# Altium PCB SIM.PcbDoc
Units mil, origin at the board's own origin, x right, y up, seen from the top; angles counter-clockwise.
Board outline 6000 x 4000 mil, 2 copper layers (Top Layer, Bottom Layer); 100 components, 81 nets, 442 pads, 8 vias.
Unrouted connection lines stored in the file: 232.
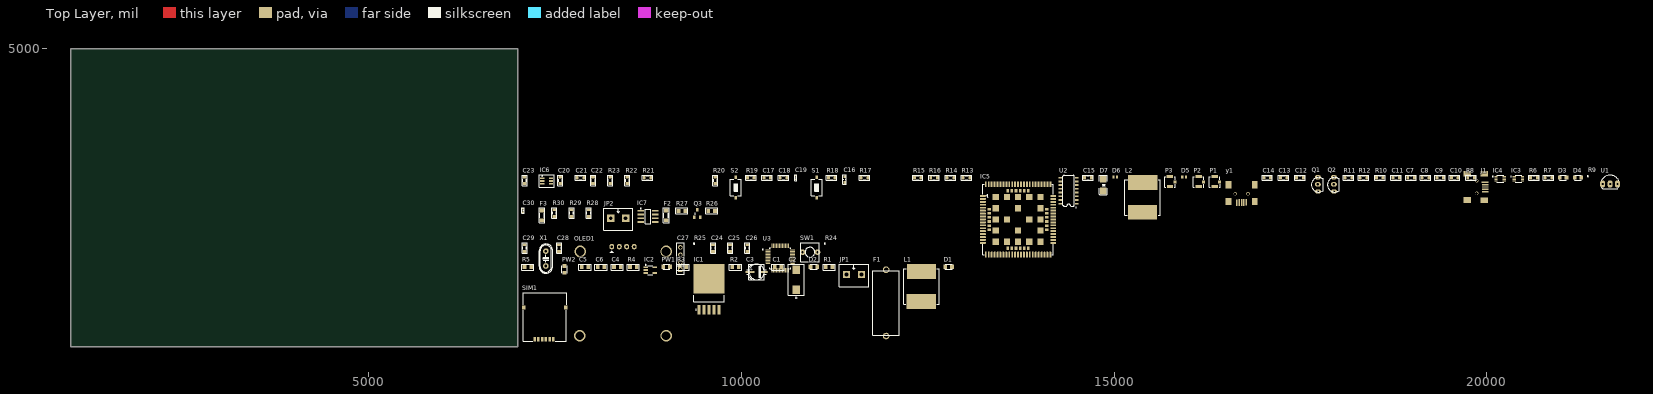
[diagram p0: Top Layer view]
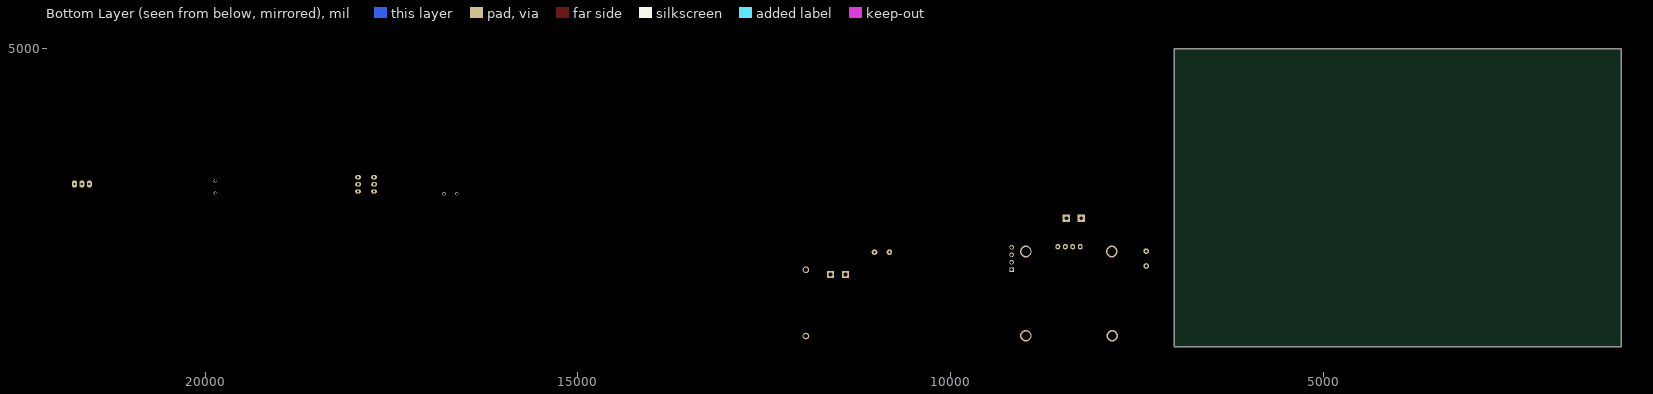
[diagram p1: Bottom Layer view, seen from below]

## Layer stack, top to bottom
Top Solder: solder mask 0.4, Solder Resist, Dk 3.5
Top Layer: signal copper 1.4
Dielectric 1: dielectric 12.6, FR-4, Dk 4.8
Bottom Layer: signal copper 1.4
Bottom Solder: solder mask 0.4, Solder Resist, Dk 3.5

## Board outline
1000,1000 7000,1000 7000,5000 1000,5000

## Design rules (kind name [scope] priority, off if disabled: settings)
Clearance [All] p1: gap=10 ignorepadtopadclearanceinfootprint=FALSE except(0: Arc-Hole Track-Hole SMDPad-Hole THPad-Hole Via-Hole Fill-Hole Poly-Hole Region-Hole Text-Hole)
PolygonConnect [All] p1: connectstyle=Relief reliefconductorwidth=10 reliefentries=4 polygonreliefangle="90 Angle" airgapwidth=10
RoutingVias [All] p1: holewidth=28 width=50 viastyle="Through Hole" minholewidth=28 minwidth=50 maxholewidth=28 maxwidth=50
SolderMaskExpansion [All] p1: expansion=4 istentingtop=FALSE
Width [All] p1: maxlimit=10 minlimit=10 preferedwidth=10
30 further rules are at their usual default settings.

## Classes and differential pairs
component class U_5.RS485: C30 D8 F2 F3 IC7 JP2 L3 Q3 R26 R27 R28 R29 R30
component class U_4.STM32: C24 C25 C26 C27 C28 C29 OLED1 R24 R25 SW1 U3 X1
component class U_2.4G: C7 C8 C9 C10 C11 C12 C13 C14 C15 C16 C17 C18 C19 C20 C21 C22 C23 D3 D4 D5 D6 D7 IC3 IC4 IC5 IC6 J1 L2 P1 P2 P3 Q1 Q2 R6 R7 R8 R9 R10 R11 R12 R13 R14 R15 R16 R17 R18 R19 R20 R21 R22 R23 S1 S2 SIM1 U1 U2 y1
component class U_1.POWER: C1 C2 C3 C4 C5 C6 D1 D2 F1 IC1 IC2 JP1 L1 PW1 PW2 R1 R2 R3 R4 R5

## Components (designator, comment, footprint, x,y, rotation, side; value= is the part's Value field where it differs from the comment)
C1 "4.7uF" C-0805 10490,2070 r0 top value=100nF
C2 "220uF" EEFSDE 10735,1900 r90 top
C3 "470uF/63V" CAP-ALU-SMD-C 10205,2005 r0 top value="Cap 470uF/63V"
C4 "4.7uF" C-0805 8335,2070 r0 top
C5 "10uF" C-0805 7900,2070 r0 top
C6 "10uF" C-0805 8115,2070 r0 top
C7 "100nF" CAP_0805 18985,3270 r0 top value=33p
C8 "10uF" CAP_0805 19180,3270 r0 top value=33p
C9 "100nF" CAP_0805 19375,3270 r0 top value=33p
C10 "100uF" CAP_0805 19570,3270 r0 top value=33p
C11 "104" CAP_0805 18785,3270 r0 top value=33p
C12 "104" CAP_0805 17495,3270 r0 top value=33p
C13 "104" CAP_0805 17275,3270 r0 top value=33p
C14 "104" CAP_0805 17055,3270 r0 top value=33p
C15 "33pF" CAP_0805 14650,3270 r0 top value=33p
C16 "10uF" CAP_0603 11385,3245 r90 top value=33p
C17 "10uF" CAP_0805 10345,3270 r0 top value=33p
C18 "10uF" CAP_0805 10565,3270 r0 top value=33p
C19 "100nF" CAP_0402 10730,3270 r90 top value=33p
C20 "22pF" CAP_0805 7570,3235 r90 top value=33p
C21 "22pF" CAP_0805 7840,3270 r0 top value=33p
C22 "22pF" CAP_0805 8010,3235 r90 top value=33p
C23 "104" CAP_0805 7090,3235 r90 top value=33p
C24 "100nF" CAP_0805 9620,2325 r90 top value=33p
C25 "104" CAP_0805 9850,2325 r90 top value=33p
C26 "104" CAP_0805 10080,2325 r90 top value=33p
C27 "JP4" JP4-C1T 9180,2035 r90 top
C28 "22pF" CAP_0805 7555,2325 r90 top value=33p
C29 "22pF" CAP_0805 7090,2325 r90 top value=33p
C30 "100nF" CAP_0402 7070,2830 r90 top value=33p
D1 "M7" LED-0805-Blue 12735,2075 r0 top value=1N4007
D2 "SS36" LED-0805-Blue 10925,2075 r0 top value="40V 3A"
D3 "NET" LED-0805-Blue 20980,3270 r0 top value="LED 3 ly Single Colour"
D4 "PPS" LED-0805-Blue 21180,3270 r0 top value="LED 3 ly Single Colour"
D5 "LXES15AAA1-153" INDC1005X45 15940,3280 r0 top value=4V
D6 "LXES15AAA1-153" INDC1005X45 15015,3280 r0 top value=4V
D7 "dio214AC SMA" DIO-SMD-106 14855,3170 r90 top value=1N4007
F1 "F1A" Fuse3 11940,1590 r90 top value=Fuse
F2 "F1A" RES-SMD-1206 8990,2765 r90 top value=Fuse
F3 "F1A" RES-SMD-1206 7325,2765 r90 top value=Fuse
IC1 "LM2576" TO-263 9565,1735 r90 top
IC2 "AP7335A-33W5-7" SOT23-5 8775,2030 r0 top
IC3 "TXB0102DCUR" SOP50P310X90-8N 20425,3255 r0 top
IC4 "TXB0102DCUR" SOP50P310X90-8N 20180,3255 r0 top
IC5 "SIM A7672S" A7672S 13711.38,2709.65 r0 top
IC6 "TPD4E001" SOT23-6 7385,3225 r0 top
IC7 "MAX3485" SOIC-8 8745,2750 r0 top
J1 "USB-5" USB-B-Mini 19965,3145 r90 top
JP1 "JP2" KF2-5.08 11510,1970 r0 top value="Connector 2"
JP2 "JP2" KF2-5.08 8345,2725 r0 top value="Connector 2"
L1 "33uH" Inductor_SMD 12175,1570 r0 top value=220uH
L2 "47nH" Inductor_SMD 15145,2765 r0 top value="150 mH"
OLED1 "SSD1306" "OLED 1.3" 8415,1755 r0 top
P1 "IPX" IPXS 16400,3215 r0 top
P2 "IPX" IPXS 16185,3215 r0 top
P3 "IPX" IPXS 15800,3215 r0 top
PW1 "LED 0805" LED-0805-Blue 8950,2075 r0 top value=Red
PW2 "LED 0805" LED-0805-Blue 7625,1995 r90 top value=Red
Q1 "3904" TRAN-LOWPOWER 17740,3175 r0 top
Q2 "3904" TRAN-LOWPOWER 17955,3175 r0 top
Q3 "C1815(MMBT4401)" SOT23 9405,2790 r0 top
R1 "10k" R-0805 11175,2070 r0 top
R2 "1k" R-0805 9920,2070 r0 top
R3 "4.7k" R-0805 9215,2070 r0 top value=3.3k
R4 "1k" R-0805 8550,2070 r0 top
R5 "0R" R-0805 7135,2070 r0 top value=1k
R6 "1k" RES-SMD-0805 20635,3270 r0 top
R7 "1k" RES-SMD-0805 20830,3270 r0 top
R8 "1k" RES-SMD-0805 19790,3270 r0 top
R9 "4,7K" RES-SMD-0101 21360,3295 r90 top
R10 "1k" RES-SMD-0805 18565,3270 r0 top
R11 "330R" RES-SMD-0805 18145,3270 r0 top
R12 "330R" RES-SMD-0805 18345,3270 r0 top
R13 "10R" RES-SMD-0805 13020,3270 r0 top
R14 "10k" RES-SMD-0805 12805,3270 r0 top
R15 "1K" RES-SMD-0805 12365,3270 r0 top
R16 "10k" RES-SMD-0805 12585,3270 r0 top
R17 "1K" RES-SMD-0805 11650,3270 r0 top
R18 "0R" RES-SMD-0805 11210,3270 r0 top
R19 "0R" RES-SMD-0805 10125,3270 r0 top
R20 "10K" RES-SMD-0805 9650,3235 r90 top
R21 "22R" RES-SMD-0805 8740,3270 r0 top
R22 "22R" RES-SMD-0805 8470,3235 r90 top
R23 "22R" RES-SMD-0805 8240,3235 r90 top
R24 "10K" RES-SMD-0101 11120,2385 r90 top
R25 "10K" RES-SMD-0101 9365,2385 r90 top
R26 "4.7k" R-0805 9600,2825 r0 top
R27 "1k" R-0805 9200,2825 r0 top
R28 "4K7" RES-SMD-0805 7950,2795 r90 top
R29 "120R" RES-SMD-0805 7720,2795 r90 top
R30 "4K7" RES-SMD-0805 7490,2795 r90 top
S1 "RST" SW-SMD 11010,3140 r90 top
S2 "BTN" SW-SMD 9925,3140 r90 top
SIM1 "Sim holder" "SIM_MicroSIM 6P Flip" 7360,1315 r0 top
SW1 "SW" SW2 10820,2270 r0 top value="SW chip 2 pin"
U1 "DS18B20" QTO-92A 21655,3185 r0 top
U2 "CH340C" SOP-16 14390,3095 r90 top
U3 "STM32F103C8T6" STM32F103C8T6 9760,2125 r0 top
X1 "4Mhz" XT2 7375,2185 r90 top
y1 "USB-5" USB-B-Mini 16710,2950 r0 top

## Footprints (in the part's own frame and the unit in brackets; to place one, negate y for a bottom-side part, rotate by r counter-clockwise, add the part's x,y. Pads: shape width x height; smd on the part's side, far side on the other; paste and mask are expansions set on the pad)
A7672S [mm] "SIMCOM A7672S"
  rrect50% 2x0.635 smd: 1(-12,8) 2(-12,7) 3(-12,6) 4(-12,5) 5(-12,4) 6(-12,3) 7(-12,2) 8(-12,1) 9(-12,0) 10(-12,-1) 11(-12,-2) 12(-12,-3) 13(-12,-4) 14(-12,-5) 15(-12,-6) 16(-12,-7) 17(-12,-8) 35(12,-8) 36(12,-7) 37(12,-6) 38(12,-5) 39(12,-4) 40(12,-3) 41(12,-2) 42(12,-1) 43(12,0) 44(12,1) 45(12,2) 46(12,3) 47(12,4) 48(12,5) 49(12,6) 50(12,7) 51(12,8)
  rrect50% 0.635x2 smd: 18(-8,-12) 19(-7,-12) 20(-6,-12) 21(-5,-12) 22(-4,-12) 23(-3,-12) 24(-2,-12) 25(-1,-12) 26(0,-12) 27(1,-12) 28(2,-12) 29(3,-12) 30(4,-12) 31(5,-12) 32(6,-12) 33(7,-12) 34(8,-12) 52(8,12) 53(7,12) 54(6,12) 55(5,12) 56(4,12) 57(3,12) 58(2,12) 59(1,12) 60(0,12) 61(-1,12) 62(-2,12) 63(-3,12) 64(-4,12) 65(-5,12) 66(-6,12) 67(-7,12) 68(-8,12) 89(-11,-12) 90(-10,-12) 91(-9,-12) 92(9,-12) 93(10,-12) 94(11,-12) 95(11,12) 96(10,12) 97(9,12) 98(-9,12) 99(-10,12) 100(-11,12)
  rect 2.1x2.1 smd: 69(-7.6,7.6) 70(-7.6,3.8) 71(-7.6,0) 72(-7.6,-3.8) 73(-7.6,-7.6) 74(-3.8,-7.6) 75(0,-7.6) 76(3.8,-7.6) 77(7.6,-7.6) 78(7.6,-3.8) 79(7.6,0) 80(7.6,3.8) 81(7.6,7.6) 82(3.8,7.6) 83(0,7.6) 84(-3.8,7.6) 85(-3.8,0) 86(0,-3.8) 87(3.8,0) 88(0,3.8)
  rect 1.1x0.9 smd: 101(-9.8,3.5) 102(-9.8,2.1) 103(-9.8,0.7) 104(-9.8,-0.7) 105(-9.8,-2.1) 106(-9.8,-3.5) 113(9.8,-3.5) 114(9.8,-2.1) 115(9.8,-0.7) 116(9.8,0.7) 117(9.8,2.1) 118(9.8,3.5)
  rect 0.9x1.1 smd: 107(-3.5,-9.8) 108(-2.1,-9.8) 109(-0.7,-9.8) 110(0.7,-9.8) 111(2.1,-9.8) 112(3.5,-9.8) 119(3.5,9.8) 120(2.1,9.8) 121(0.7,9.8) 122(-0.7,9.8) 123(-2.1,9.8) 124(-3.5,9.8)
  silkscreen extent -12,-12 12,12, body extent -12,-12 12,12, height 2.6
C-0805 [mil] "Compoment SMD 80x50mil"
  rect 50x55 smd: 1(-45,0) 2(45,0)
  silkscreen extent -81,-39 81,39, body extent -40,-25 40,25, height 24
CAP-ALU-SMD-C [mm]
  rect 3x0.7 smd: 1(-2.286,0)
  oval 3x0.7 smd: 2(2.286,0)
  silkscreen extent -3.35,-2.65 3.28,2.65, body extent -2.95,-2.65 2.95,2.65, height 5.41
CAP_0402 [mm]
  rect 0.5x0.6 smd: 1(-0.61,0) 2(0.61,0)
  silkscreen extent -0.97,-0.38 0.97,0.41, body extent -0.5,-0.27 0.5,0.26, height 0.35
CAP_0603 [mm]
  rect 1x0.95 smd mask+0.076: 1(-0.94,0) 2(0.94,0)
  silkscreen extent -1.57,-0.58 1.57,0.58, body extent -0.77,-0.39 0.83,0.41, height 0.9
CAP_0805 [mil]
  rect 39.37x55 smd: 1(-45,0) 2(45,0)
  silkscreen extent -70,-34 70,33, body extent -40,-25 40,25, height 24
DIO-SMD-106 [mil]
  rect 90x90.55 smd: 1(80,0) 2(-80,0)
  silkscreen extent -130,-55 135,55, body extent -99,-50 106,52, height 95
EEFSDE [mm]
  rect 3x2.4 smd: 1(-3.429,0) 2(3.429,0)
  silkscreen extent -6.48,-2.66 5.33,2.66, body extent -3.81,-2.15 3.81,2.15, height 4.21
Fuse3 [mm] "FUSEHOLDER BLOCKS - PCB - CLIP COVER - THT - WR-FSH"
  round 2.25 hole 1.5: 1(-11.3,0) 2(11.3,0)
  silkscreen extent -11,-4.5 11,4.5, body extent -13.3,-4.5 13.3,4.5, height 28.11
INDC1005X45 [mm]
  rect 0.7x0.9 smd: 1(-0.65,0) 2(0.65,0)
Inductor_SMD [mm]
  rect 10x5 smd: 1(6.096,11.176) 2(6,1)
  silkscreen extent 0,0 12.1,12.1, body extent 0.1,-0.2 12.1,12.14, height 7.15
IPXS [mm] "SOT 23 _ 1-3-2"
  rect 1x1 smd: 1(0.415,-0.01)
  rect 2.2x1 smd: 2(-1.273,-1.658) 3(-1.278,1.73)
  silkscreen extent -3.13,-1.79 0.53,1.73, body extent -2.83,-1.49 0.31,1.56, height 1.55
JP4-C1T [mm] "4 row, straight, gold plating"
  rect 1.52x1.52 hole 1.02: 1(0,0)
  round 1.52 hole 1.02: 2(2.54,0) 3(5.08,0) 4(7.62,0)
  silkscreen extent -1.52,-1.27 9.14,1.27, body extent -1.52,-1.25 9.14,1.25, height 8.51
KF2-5.08 [mm]
  rect 2.5x2.5 hole 1.3: 1(-2.54,0) 2(2.54,0)
  silkscreen extent -4.95,-4.08 4.95,3.43, body extent -5,-4.07 5,3.43, height 10
LED-0805-Blue [mil]
  rect 50x55 smd: 1(0,0) 2(90,0)
  silkscreen extent 0,-35 90,35, body extent 5,-25 85,25, height 43
"OLED 1.3" [mil]
  oval 65x75 hole 36: 1(-155,590) 2(-54,590) 3(44,590) 4(145,590)
  silkscreen extent -180,509 -130,534, body extent -661,-687 657,640, height 553
QTO-92A [mil] "TO-92"
  oval 66x100 hole 32: 1(100,0) 2(0,0) 3(-100,0)
  silkscreen extent -117,-65 119,118, body extent -110,-61 108,100, height 245
R-0805 [mil] "Compoment SMD 80x50mil"
  rect 50x55 smd: 1(-45,0) 2(45,0)
  silkscreen extent -81,-39 81,39, body extent -39,-25 39,25, height 31
RES-SMD-0101 [mm]
  rect 0.15x0.25 smd: 1(-0.2,0) 2(0.2,0)
  silkscreen extent -0.25,-0.13 0.25,0.13, body extent -0.2,-0.1 0.2,0.1, height 0.12
RES-SMD-0805 [mil]
  rect 39.37x55 smd: 1(-45,0) 2(45,0)
  silkscreen extent -70,-34 70,33, body extent -39,-25 39,25, height 31
RES-SMD-1206 [mil]
  rect 50x65 smd: 1(-65,0) 2(65,0)
  silkscreen extent -99,-38 99,39, body extent -63,-31 63,32, height 40
"SIM_MicroSIM 6P Flip" [mm]
  rect 0.85x1.4 smd: 1(-2.16,-5.415) 2(0.38,-5.415) 3(2.92,-5.415) 5(-3.43,-5.415) 6(-0.89,-5.415) 7(1.65,-5.415)
  rect 1.2x1.5 smd: 8(-7.15,5.415) 8(7.15,5.415)
  Top Layer pour cut-out: 3.683,-2.79 -4.293,-2.79 -4.293,1.96 3.683,1.96
  Top Layer pour cut-out: 3.683,8.788 -4.293,8.788 -4.293,4.039 3.683,4.039
  silkscreen extent -7.35,-6.02 7.35,10.52, body extent -7.61,-5.89 7.59,10.41, height 1.7
SOIC-8 [mm] "SOIC, 8-Leads, Body 5,0x4,0mm (max), Pitch 1,27mm, IPC Medium Density"
  rect 2.2x0.6 smd: 1(-2.475,1.905) 2(-2.475,0.635) 3(-2.475,-0.635) 4(-2.475,-1.905) 5(2.475,-1.905) 6(2.475,-0.635) 7(2.475,0.635) 8(2.475,1.905)
  silkscreen extent -2.6,-2.5 0.98,2.88, body extent -3.2,-2.5 3.2,2.5, height 1.75
SOP50P310X90-8N [mm]
  rrect25% 1.12x0.27 smd: 1(-1.405,0.75) 2(-1.405,0.25) 3(-1.405,-0.25) 4(-1.405,-0.75) 5(1.405,-0.75) 6(1.405,-0.25) 7(1.405,0.25) 8(1.405,0.75)
  silkscreen extent -2.62,-1.2 1.15,1.2
SOP-16 [mm]
  rect 0.6x1.2 smd: 1(-4.445,-2.8) 2(-3.175,-2.8) 3(-1.905,-2.8) 4(-0.635,-2.8) 5(0.635,-2.8) 6(1.905,-2.8) 7(3.175,-2.8) 8(4.445,-2.8) 9(4.445,2.8) 10(3.175,2.8) 11(1.905,2.8) 12(0.635,2.8) 13(-0.635,2.8) 14(-1.905,2.8) 15(-3.175,2.8) 16(-4.445,2.8)
  silkscreen extent -5.84,-2.67 5.26,1.95, body extent -4.95,-3.47 4.95,3.47, height 1.75
SOT23 [mm] "SOT 23 _ 1-3-2"
  rect 0.85x1.2 smd: 1(-0.94,-1.245) 2(0.985,-1.25) 3(0.005,1.25)
  silkscreen extent -0.88,-0.25 -0.64,0, body extent -1.47,-1.33 1.53,1.17, height 1.06
SOT23-5 [mm] "SOT23, 5-Leads, Body 3.0x3.0mm (max), Pitch 0.95mm, IPC Medium Density"
  rect 1.5x0.6 smd: 1(-1.5,0.95) 2(-1.5,0) 3(-1.5,-0.95) 4(1.5,-0.95) 5(1.5,0.95)
  silkscreen extent -1.62,-1.52 0.87,1.92, body extent -1.75,-1.52 1.75,1.53, height 1.45
SOT23-6 [mm] "SOT23, 5-Leads, Body 3.0x3.0mm (max), Pitch 0.95mm, IPC Medium Density"
  rect 1.5x0.6 smd: 1(-1.5,0.95) 2(-1.5,0) 3(-1.5,-0.95) 4(1.5,-0.95) 5(1.5,0) 6(1.5,0.95)
  silkscreen extent -2.54,-2.11 2.54,2.11, body extent -1.75,-1.52 1.75,1.53, height 1.45
STM32F103C8T6 [mm]
  rrect50% 1.56x0.28 smd: 1(15.124,4.401) 2(15.124,3.901) 3(15.124,3.401) 4(15.124,2.901) 5(15.124,2.401) 6(15.124,1.901) 7(15.124,1.401) 8(15.124,0.901) 9(15.124,0.401) 10(15.124,-0.099) 11(15.124,-0.599) 12(15.124,-1.099) 25(23.484,-1.099) 26(23.484,-0.599) 27(23.484,-0.099) 28(23.484,0.401) 29(23.484,0.901) 30(23.484,1.401) 31(23.484,1.901) 32(23.484,2.401) 33(23.484,2.901) 34(23.484,3.401) 35(23.484,3.901) 36(23.484,4.401)
  rrect50% 0.28x1.56 smd: 13(16.554,-2.529) 14(17.054,-2.529) 15(17.554,-2.529) 16(18.054,-2.529) 17(18.554,-2.529) 18(19.054,-2.529) 19(19.554,-2.529) 20(20.054,-2.529) 21(20.554,-2.529) 22(21.054,-2.529) 23(21.554,-2.529) 24(22.054,-2.529) 37(22.054,5.831) 38(21.554,5.831) 39(21.054,5.831) 40(20.554,5.831) 41(20.054,5.831) 42(19.554,5.831) 43(19.054,5.831) 44(18.554,5.831) 45(18.054,5.831) 46(17.554,5.831) 47(17.054,5.831) 48(16.554,5.831)
  silkscreen extent 13.15,-1.95 22.9,5.25
SW2 [mil] "SW button 2pin, 250x 250 mil"
  round 75 hole 31: 1(0,0) 2(200,0)
  silkscreen extent -25,-125 225,125
SW-SMD [mm] "Switch SMD type"
  rect 1.2x0.8 smd: 1(-3.5,0) 2(3.5,0)
  silkscreen extent -2.82,-1.85 2.82,1.85, body extent -3.05,-1.85 3.05,1.85, height 2.5
TO-263 [mm]
  rect 3.2x1.05 smd: 1(-6,3.4) 2(-6,1.7) 3(-6,0) 4(-6,-1.7) 5(-6,-3.4)
  rect 10x10.45 smd: 6(4.5,0)
  silkscreen extent -6.12,-5.2 -1.1,5.2, body extent -6.58,-5.2 7.57,5.2, height 4.65
TRAN-LOWPOWER [mm] "TO, Flat Index; 3 In-Line, Axial Leads; Body Dia. 4.5mm; Leads 0.51 x 0.48 mm (max)"
  oval 2x1.5 hole 0.8: 1(-0.127,-2.286) 2(-0.151,0.139) 3(-0.127,2.564)
  silkscreen extent -2.35,-2.48 1.63,2.48, body extent -2.48,-2.79 1.52,3.01, height 11
USB-B-Mini [mm]
  rect 2x2.5 smd: 0(-4.5,0) 0(-4.496,5.74) 0(4.5,0) 0(4.504,5.74)
  rect 0.5x2.25 smd: 1(1.575,-0.305) 2(0.787,-0.317) 3(0,-0.33) 4(-0.787,-0.343) 5(-1.575,-0.356)
  body extent -5.35,-0.67 5.35,8.53, height 3.95
XT2 [mil] "Footpin for Crystal 2 pin"
  round 75 hole 34: 1(-100,0) 2(100,0)
  silkscreen extent -198,-90 195,90, body extent -233,-93 213,90, height 138

## Part data
C1 C4: library part C, "4.7µF ±10% 35V Ceramic Capacitor X5R 0805 (2012 Metric)", Manufacturer="Samsung Electro-Mechanics", Package=0805, Part number=CL21A475KLCLQNC, Category=CAPACITOR, User_Description="CAP CER 4.7UF 35V X5R 0805"
C2: library part CP5, "220µF Molded Tantalum Polymer Capacitor 16V 2917 (7343 Metric) 40mOhm @ 100kHz", Manufacturer="AVX Corporation", Package=2917, Part number=TCME227M016R0040E, Category=CAPACITOR, User_Description="CAP TANT POLY 220UF 16V 2917"
C3: library part CP3, "Cap 470uF/63V"
C5 C6: library part C, "Cap SMD", Manufacturer="Samsung Electro-Mechanics", Package=0805, Part number=CL21A106KPFNNNG, Category=CAPACITOR, User_Description="CAP CER 10UF 10V X5R 0805"
C7 C8 C9 C10 C11 C12 C13 C14 C15 C16 C17 C18 C19 C20 C21 C22 C23 C24 C25 C26 C28 C29 C30: library part CapSMD, "Capacitor", LatestRevisionDate=17-Jul-2002, LatestRevisionNote="Re-released for DXP Platform.", PackageReference=RAD-0.3, Published=8-Jun-2000, Publisher="Altium Limited"
C27: "WR-PHD 2.54 mm Angled Socket Header", Manufacturer="W¨¹rth Elektronik eiSos GmbH", partNo=613004143121, ComponentLink1 Description=Manufacturer, ComponentLink1URL=http://www.we-online.com, ComponentLink2 Description=Datasheet, ComponentLink2URL=http://katalog.we-online.de/em/datasheet/6130xx143121.pdf, Created by="Karrer Zheng", Created Date="29 March 2013", NoPins=04
D1 D7: library part D1A, "Diode 1A"
D2: library part B340A, "Diode Schottky 40V 3A Surface Mount DO-214AC (SMA)", Manufacturer="Vishay General Semiconductor - Diodes Division", Package=DO214AC, Part number=B340A-M3/61T, Category=DIODE, User_Description="DIODE SCHOTTKY 40V 3A DO214AC"
D3 D4: library part LED, "LED Single colour Green and Red"
D5 D6: library part TVS, "TVS DIODE 4VWM 1005", Manufacturer="Murata Electronics", Package=0402, Category="Circuit Protection", Part number=LXES15AAA1-153, User_Description="TVS DIODE 4VWM 1005"
F1: library part Fuse, "Fuse"
F2 F3: library part Fuse, "F smd1206 0.315A", Designed by=VanDungEvn
IC2: Package=SOT23-5, Part number=AP7335A-33W5-7
IC3 IC4: "IC TRNSLTR BIDIRECTIONAL US8", Manufacturer="Texas Instruments", Package=8-VSSOP, Category="IC Logic Level", Part number=TXB0102DCUR, User_Description="IC TRNSLTR BIDIRECTIONAL US8"
IC5: "SIM A7672S-CAT-M1", Part number="SIM A7672S"
IC6: library part TPD4E001_1, Manufacturer="Texas Instruments", Package=SOT-363, Part number=TPD4E001RDBVR, Category="Circuit Protection", User_Description="TVS DIODE 5.5VWM SC70-6"
IC7: library part MAX3362EKA+T, "IC TRANSCEIVER HALF 1/1 SOT23-8", Manufacturer="Maxim Integrated", Package=SOT-23-8, Category="Interface - Drivers", Part number=MAX3362EKA+T, User_Description="IC TRANSCEIVER HALF 1/1 SOT23-8"
J1 y1: Manufacturer=FCI, Category="Connectors, Interconnects"
JP1 JP2: library part Con2, "Connector 2"
L1: library part L1, "22µH Shielded Inductor 1.65A 96mOhm Max Nonstandard", Manufacturer="Bourns Inc.", Package=SMD, Part number=SRR0745A-220M, Category=INDUCTORS, User_Description="FIXED IND 22UH 1.65A 96 MOHM SMD"
L2: library part "Inductor Ferit", "FIXED IND 47NH 300MA 700MOHM SMD", Manufacturer="Taiyo Yuden", Package=0603, Part number=HK160847NJ-T, Category=INDUCTORS, User_Description="FIXED IND 47NH 300MA 700MOHM SMD"
OLED1: library part "OLED 1.3\"", "OLED 1.3\" SSD1306"
P1 P2 P3: library part IPXSx66, "Antenna GSM GPS", Manufacturer="TE Connectivity AMP Connectors", Package=SMD, Part number=2334884-1, Category=Connectors, User_Description="UMCC MICRO-COAX RECEPTACLE, GEN"
PW1 PW2: library part LED, "LED RED DIFFUSED 0805 SMD", Manufacturer="OSRAM Opto Semiconductors Inc.", Package=0805, Part number="LS R976-NR-1", Category="LED SMD", User_Description="LED RED DIFFUSED 0805 SMD"
Q1 Q2: library part MMBT3904
Q3: library part NPN, "Transistor C1815, SOT23", Manufacturer="Fairchild Semiconductor", Package=SOT-23, Part number=MMBT4401, Category="TRAN NPN", User_Description="0.6A, 40V, NPN"
R1: library part R, "RES SMD 10K OHM 1% 1/8W 0805", Manufacturer=Yageo, Package=0805, Part number=RC0805FR-0710KL, Category=RESISTORS, User_Description="RES SMD 10K OHM 1% 1/8W 0805"
R2 R4 R5 R27: library part R, "Resistor 1/4W", Manufacturer=Yageo, Package=0805, Part number=RC0805FR-071KL, Category=RESISTORS, User_Description="RES SMD 1K OHM 1% 1/8W 0805"
R3: library part R, "RES SMD 3.3K OHM 1% 1/8W 0805", Manufacturer=Yageo, Package=0805, Part number=RC0805FR-073K3L, Category=RESISTORS, User_Description="RES SMD 3.3K OHM 1% 1/8W 0805"
R6 R7 R8 R10 R11 R12 R13 R14 R15 R16 R17 R18 R19 R20 R21 R22 R23 R24 R25: library part "Resistor - SMD", "Resistor", Manufacturer="Generic Components", Class=Passive, Published=08/06/2000, Publisher="Altium Hobart Technology Centre"
R9 R28 R29 R30: library part "Resistor - SMD", "Resistor SMD", Manufacturer="Generic Components", Class=Passive, Published=08/06/2000, Publisher="Altium Hobart Technology Centre"
R26: library part R, "RES SMD 4.7K OHM 1% 1/8W 0805", Manufacturer=Yageo, Package=0805, Part number=RC0805FR-074K7L, Category=RESISTORS, User_Description="RES SMD 4.7K OHM 1% 1/8W 0805"
S1 S2: library part SW-SMD, "Switch", LatestRevisionDate=17-Jul-2002, LatestRevisionNote="Re-released for DXP Platform.", PackageReference=SPST-2, Published=24-Mar-1999, Publisher="Altium Limited"
SIM1: library part SIM_MicroSim
SW1: library part SW2, "Switch button 2 pin"
U1: "High Precision  1-Wire® Digital Thermometer"
U2: "USB to serial chip CH340", Package=Package, Availability=Unavailable, Check_prices=https://www.snapeda.com/parts/CH340C/WCH/view-part/5428851/?ref=eda, MF=WCH, MP=CH340C, Price=None, SnapEDA_Link=https://www.snapeda.com/parts/CH340C/WCH/view-part/5428851/?ref=snap
U3: "Mainstream Performance line, ARM Cortex-M3 MCU with 64 Kbytes Flash, 72 MHz CPU, motor control, USB and CAN"
X1: library part XT2, "Crystal For all Crystal 2pin."

## Via types
v1: diameter 157.48, hole 118.11, Top Layer to Bottom Layer, 4 vias
v2: diameter 47.24, hole 39.37, Top Layer to Bottom Layer, 4 vias

## Nets (pads, with @x,y where several pads share a name; then routed paths per layer and width w, separated by ;. In a path a pad name is that pad's centre, name@x,y a point inside that pad or via, vN(x,y) a via of type N, cw(c..) or ccw(c..) an arc to the next point about the centre after c; other vN are vias at no path point)
1.8V: C12.2 C14.2 C17.2 IC3.3 IC4.3 IC5.15 R8.1 R10.1 R18.2
3.3LOG_RX: IC3.1 U2.2
3.3LOG_TX: IC3.8 U2.3
3.3V: C6.1 C11.2 C13.2 IC2.5 IC3.7 IC4.7 R4.2 R26.1
3.8V: C2.1 C4.2 C5.1 C7.2 C8.2 C9.2 C10.2 IC2.1 IC2.3 IC5.55 IC5.56 IC5.57 L1.2 R1.2 R2.1 R6.2 R7.2 R9.2 U1.3
3V3: C19.1 C25.1 C26.1 C27.1 C30.1 IC7.8 OLED1.2 R24.1 R28.2 U2.4 U3.24 U3.36 U3.48
5V: C18.1 D7.2 U2.16
485DE/RE: R27.1
A: IC7.6 R30.1
B: IC7.7 R28.1
CLK: IC6.1 R23.2 SIM1.3
DATA: IC5.5 IC6.3 R9.1 R21.2 SIM1.7 U1.2
DE/RE: IC7.2 IC7.3 Q3.3 R26.2
DIO: C27.2 U3.34
DM: IC5.28 J1.2
DP: IC5.27 J1.3
GND: C4.1 C5.2 C6.2 C7.1 C8.1 C9.1 C10.1 C11.1 C12.1 C13.1 C14.1 C16.1 C17.1 C18.2 C19.2 C20.1 C21.1 C22.1 C23.1 C24.2 C25.2 C26.2 C27.4 C28.1 C29.1 C30.2 D5.2 D6.2 IC2.2 IC3.2 IC4.2 IC5.2 IC5.17 IC5.18 IC5.29 IC5.39 IC5.45 IC5.46 IC5.54 IC5.58 IC5.59 IC5.61 IC5.62 IC5.63 IC5.64 IC5.65 IC5.89 IC5.91 IC5.92 IC5.94 IC6.2 IC7.5 J1.5 OLED1.1 P1.2 P1.3 P2.2 P2.3 P3.2 P3.3 PW1.2 PW2.2 Q1.2 Q2.2 Q3.2 R5.1 R15.1 R20.1 R25.1 R30.2 S1.1 SIM1.5 SIM1.8 SW1.2 U1.1 U2.1 U3.23 U3.35 U3.47 y1.5
GND_IN: C1.1 C2.2 C3.2 D2.1 IC1.3 IC1.5 IC1.6 JP1.1 R3.1 R5.2
LOG_RX: IC3.4 IC5.22
LOG_TX: IC3.5 IC5.23
NET: IC5.52
NetC15_1: C15.1 IC5.90
NetC15_2: C15.2 L2.1 P2.1
NetC20_2: C20.2 IC5.32 R23.1
NetC21_2: C21.2 IC5.33 R22.1
NetC22_2: C22.2 IC5.31 R21.1
NetC28_2: C28.2 U3.5 X1.2
NetC29_2: C29.2 U3.6 X1.1
NetD1_1: D1.1 F1.2
NetD2_2: D2.2 IC1.2 L1.1
NetD3_1: D3.1 R6.1
NetD3_2: D3.2 Q1.3
NetD4_1: D4.1 R7.1
NetD4_2: D4.2 Q2.3
NetD5_1: D5.1 IC5.93 P1.1
NetD6_1: D6.1 IC5.60 P3.1
NetD7_1: D7.1 y1.1
NetF1_1: F1.1 JP1.2
NetF2_1: F2.1
NetF2_2: F2.2 JP2.1 R29.1
NetF3_1: F3.1
NetF3_2: F3.2 JP2.2 R29.2
NetIC1_4: IC1.4 R1.1 R3.2
NetIC3_6: IC3.6 R8.2
NetIC4_1: IC4.1 U3.30
NetIC4_6: IC4.6 R10.2
NetIC4_8: IC4.8 U3.31
NetIC5_1: IC5.1 R15.2
NetIC5_6: IC5.6 S2.2
NetIC5_16: IC5.16 R17.2
NetIC5_20: IC5.20 R19.1
NetIC5_49: IC5.49 R16.2
NetIC5_50: IC5.50 R14.2
NetIC5_95: IC5.95 R16.1
NetIC5_96: IC5.96 R14.1
NetIC5_97: IC5.97 IC5.116 R18.1
NetIC5_98: IC5.98 R19.2
NetIC5_99: IC5.99 R13.1
NetIC7_1: IC7.1 U3.39
NetIC7_4: IC7.4 U3.20
NetL2_2: L2.2 R13.2
NetPW1_1: PW1.1 R2.2
NetPW2_1: PW2.1 R4.1
NetQ1_1: Q1.1 R11.1
NetQ2_1: Q2.1 R12.1
NetQ3_1: Q3.1 R27.2
NetR17_1: R17.1 S1.2
NetR20_2: R20.2 S2.1
NetR25_2: R25.2 U3.44
NetU2_5: U2.5 y1.3
NetU2_6: U2.6 y1.2
OLED_SCL: OLED1.3 U3.42
OLED_SDA: OLED1.4 U3.43
RESET: IC6.6 R22.2 SIM1.2
SIM_PPS: IC5.100 R12.2
SIM_RX: IC4.4 IC5.10
SIM_TX: IC4.5 IC5.9
STATUS: IC5.66 R11.2
V_USIM: C23.2 IC5.30 IC6.5 SIM1.1
VBUS: C16.2 IC5.24 J1.1
VIN: C1.2 C3.1 D1.2 IC1.1
pads on no net: C24.1 C27.3 IC2.4 IC5.3 IC5.4 IC5.7 IC5.8 IC5.11 IC5.12 IC5.13 IC5.14 IC5.19 IC5.21 IC5.25 IC5.26 IC5.34 IC5.35 IC5.36 IC5.37 IC5.38 IC5.40 IC5.41 IC5.42 IC5.43 IC5.44 IC5.47 IC5.48 IC5.51 IC5.53 IC5.67 IC5.68 IC5.69 IC5.70 IC5.71 IC5.72 IC5.73 IC5.74 IC5.75 IC5.76 IC5.77 IC5.78 IC5.79 IC5.80 IC5.81 IC5.82 IC5.83 IC5.84 IC5.85 IC5.86 IC5.87 IC5.88 IC5.101 IC5.102 IC5.103 IC5.104 IC5.105 IC5.106 IC5.107 IC5.108 IC5.109 IC5.110 IC5.111 IC5.112 IC5.113 IC5.114 IC5.115 IC5.117 IC5.118 IC5.119 IC5.120 IC5.121 IC5.122 IC5.123 IC5.124 IC6.4 J1.0 J1.4 R24.2 SIM1.6 SW1.1 U2.7 U2.8 U2.9 U2.10 U2.11 U2.12 U2.13 U2.14 U2.15 U3.1 U3.2 U3.3 U3.4 U3.7 U3.8 U3.9 U3.10 U3.11 U3.12 U3.13 U3.14 U3.15 U3.16 U3.17 U3.18 U3.19 U3.21 U3.22 U3.25 U3.26 U3.27 U3.28 U3.29 U3.32 U3.33 U3.37 U3.38 U3.40 U3.41 U3.45 U3.46 y1.0 y1.4
copper on no net:
  other v1: 7831,1148 8989,1148 7836,2279 8989,2279
  other v2: 16623.39,3051.57 16796.61,3051.57 19863.43,3058.39 19863.43,3231.61

## Text inside footprints (layer, text, board x,y; h text height)
C3: Top Overlay "+" at 10120.35,2017.8 h35